# EAGLE board LPC_2TE_3.3 (EAGLE 5.00)
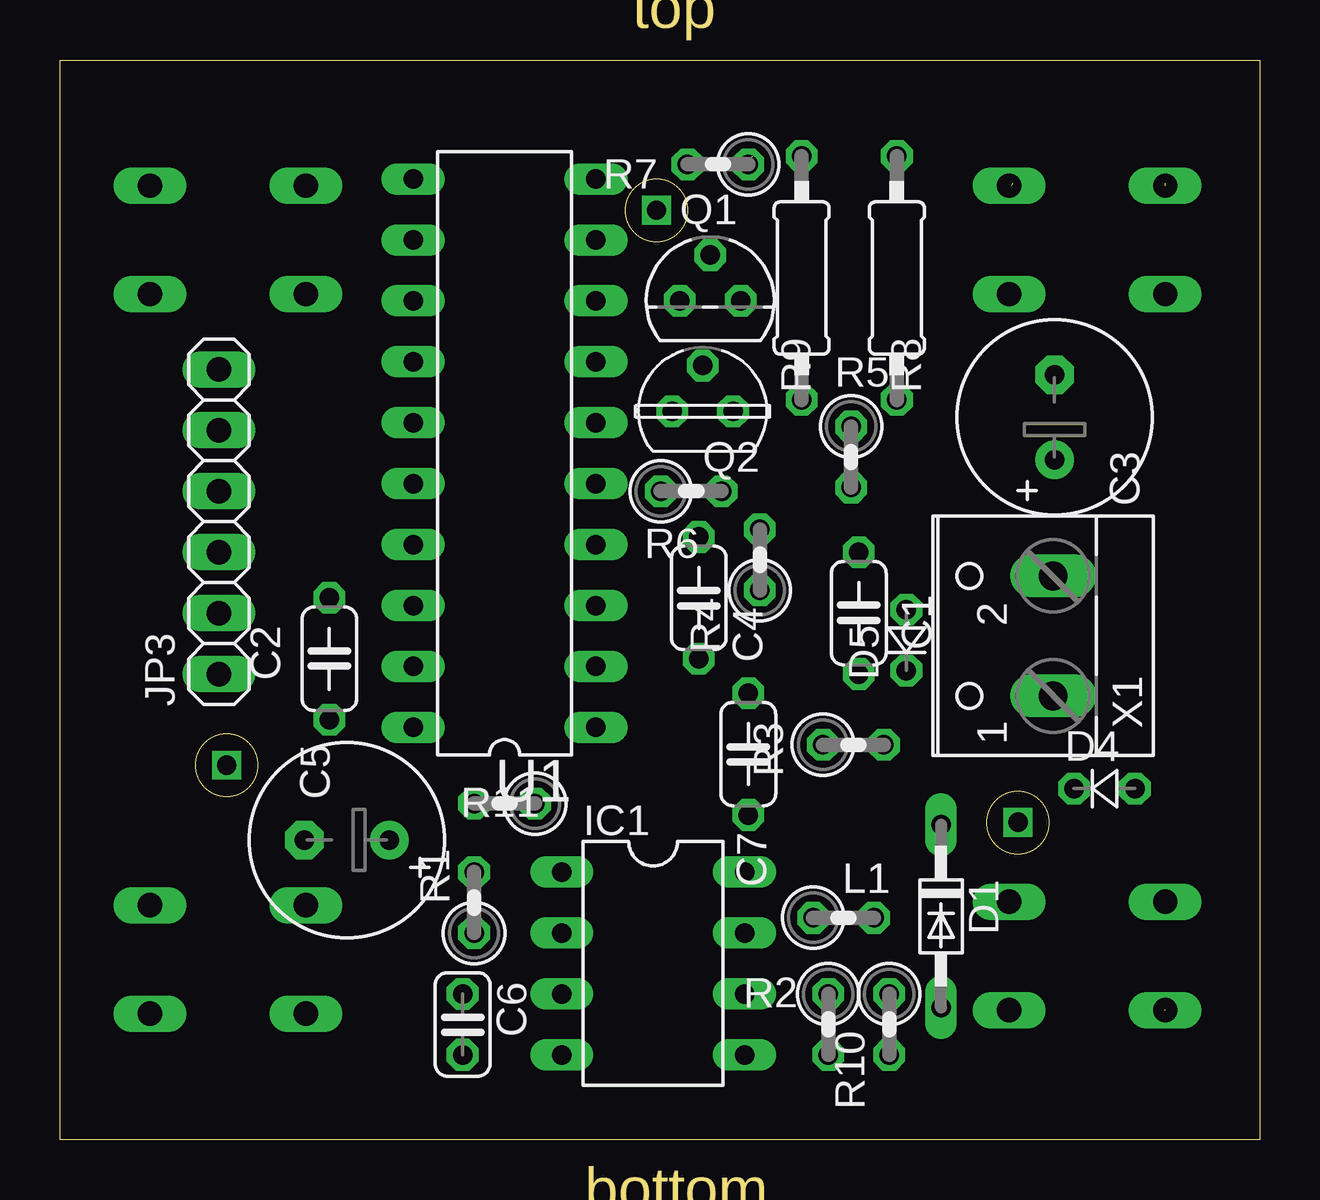
[diagram p0: board, top side]
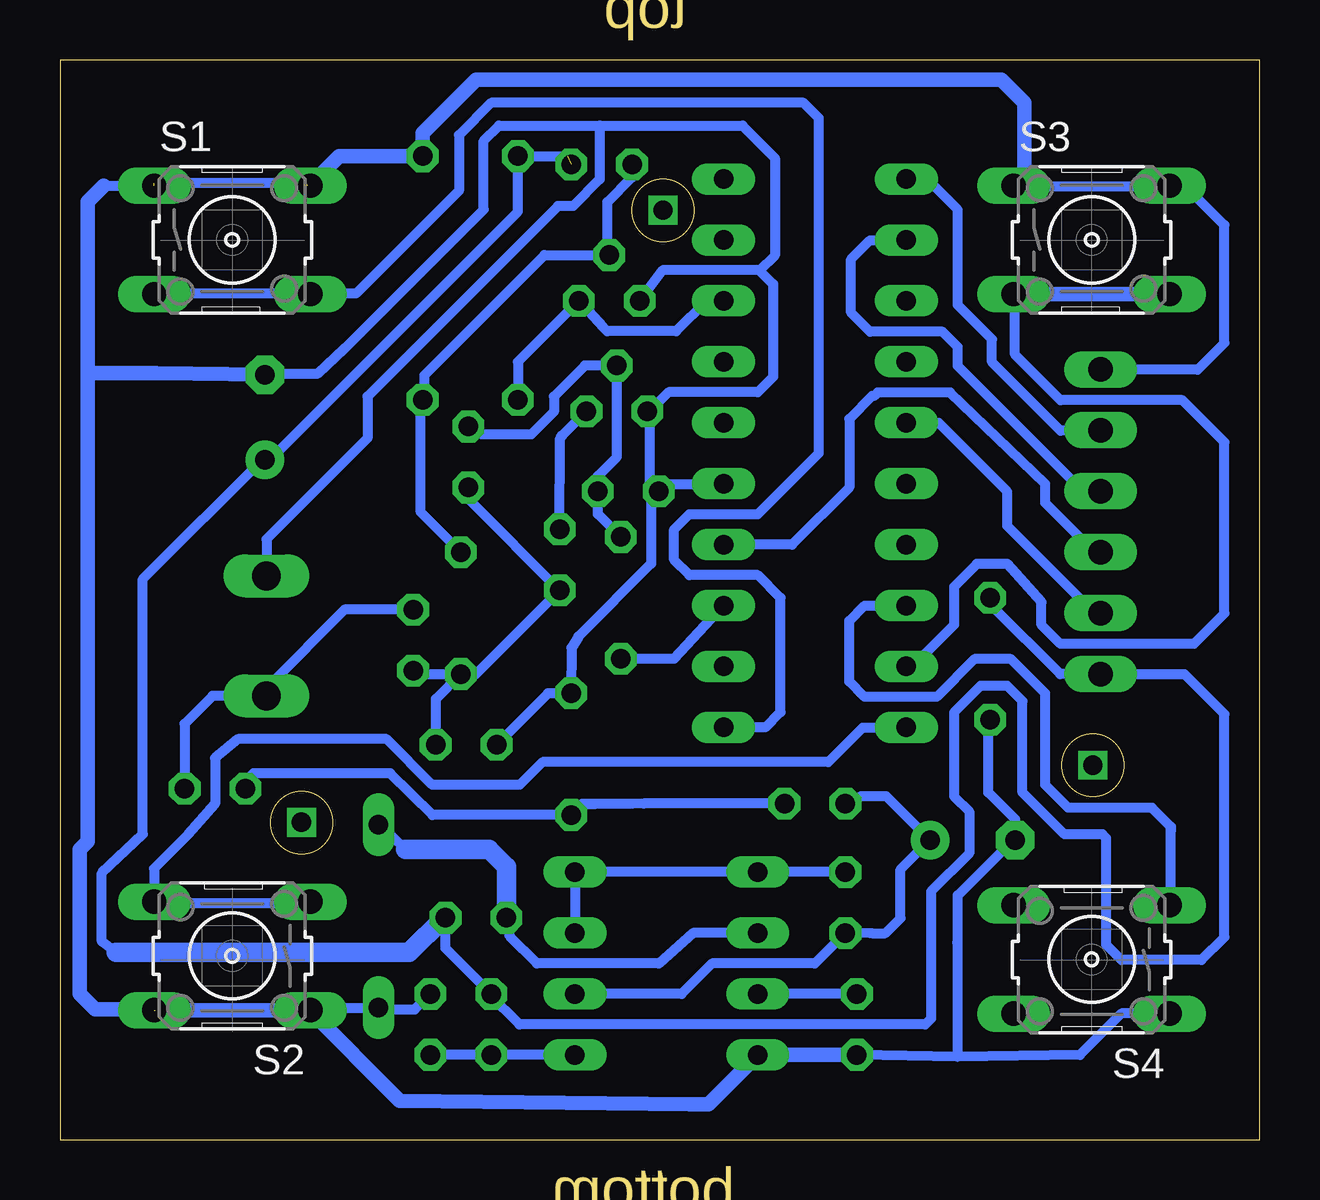
[diagram p1: board, bottom side, seen from below]

Size 50 x 45 mm. Coordinates in mm from the lower left corner, seen from the top.
Outline: 50,0 0,0 0,45 50,45 50,0
Outline: circle at 39.93,13.21 radius 1.3
Outline: circle at 24.87,38.73 radius 1.3
Outline: circle at 6.95,15.6 radius 1.3
Copper layers (1*16): Top 0.035mm / dielectric 1.5mm / Bottom 0.035mm
Design rules "default *": minimum track width 10mil, minimum drill 24mil, track to track 12mil, track to pad 12mil, pad to pad 12mil, via to via 16mil, smd to smd 8mil, copper to edge 20mil, drill to drill 8mil, minimum pad ring 10mil, minimum via ring 8mil, stop-mask expansion 4mil, vias tented up to drill 0mil, thermal gap 10mil
tKeepout: area 16.2,44 to 33.7,45; area 0,0.1 to 4,45; area 0.1,0 to 50,1; area 45.8,0.1 to 50,45; area 39.6,38.3 to 45.9,44.9; area 36.2,41.7 to 39.6,45; area 34.5,43.2 to 36.1,45; area 43,35 to 45.8,38.3; area 44.6,33.4 to 45.8,34.9; area 41.4,36.6 to 42.9,38.2; area 37.9,39.9 to 39.6,41.7; area 40.8,0.8 to 45.9,7.7; area 37.5,0.7 to 40.6,4.6; area 3.5,44.1 to 16.2,45; area 3.8,38.1 to 10.4,44.1; area 4,34.8 to 7.1,38.1; area 10.4,41.2 to 13.4,44.1; area 13.4,42.6 to 14.8,44.1; area 10.3,39.9 to 12.1,41.2; area 7.1,36.5 to 8.7,38; area 4,33.1 to 5.4,34.7; area 33.8,44.1 to 34.5,45; area 4,1 to 9.9,7.1; area 4.1,7 to 6.7,10.2; area 4,10.2 to 5.2,11.6; area 6.7,7 to 8.1,8.7; area 9.9,1 to 12.8,4.3; area 9.8,4.3 to 11.1,5.8; area 12.7,1 to 14.5,2.6; area 43.5,7.4 to 45.8,10.6; area 42.2,7.7 to 43.5,9.4; area 44.8,10.6 to 45.8,11.9; area 39.2,4.5 to 40.8,6.5; area 40.6,0.8 to 41.1,4.7; area 36.1,1.1 to 37.5,3.3; area 35.2,1 to 36.1,2.4; area 28.9,0 to 31.4,1; 10 lines
bKeepout: area 18.3,18 to 19.6,21.2; area 30.5,18 to 31.8,27.9; area 45,17.2 to 50,27.2; area 57.8,34.3 to 62.8,44.3; area 51.1,34.3 to 56.1,44.3; area 0,17.2 to 5,27.2; area 0,0 to 50,2.8; area 0,42.2 to 50,45; area 22.4,38.3 to 27.4,39.2; area 39.4,11 to 40.5,15.4; area 6.5,13.4 to 7.5,17.8; area 47.8,0 to 50,45; area 0,0 to 2.2,45

## Footprints (pad centres in the part's own frame; a part is rotated, then mirrored left to right if it is on the bottom)
C050-024X044 = drill 0.813 octagon: 1 -2.54,0; 2 2.54,0
E3,5-8 = drill 0.813 pad 1.6 round: + -1.778,0 | drill 0.813 pad 1.6 octagon: - 1.778,0
C025-024X044 = drill 0.813 octagon: 1 -1.27,0; 2 1.27,0
DO34-7 = drill 0.813 long: A 3.81,0; C -3.81,0
D-2.5 = drill 0.813 octagon: A 1.27,0; C -1.27,0
DIL08 = drill 0.813 long: 1 -3.81,-3.81; 2 -1.27,-3.81; 3 1.27,-3.81; 4 3.81,-3.81; 5 3.81,3.81; 6 1.27,3.81; 7 -1.27,3.81; 8 -3.81,3.81
1X06 = drill 1.016 long: 1 -6.35,0; 2 -3.81,0; 3 -1.27,0; 4 1.27,0; 5 3.81,0; 6 6.35,0
0207/2V = drill 0.813 octagon: 1 -1.27,0; 2 1.27,0
TO92 = drill 0.813 octagon: 1 1.27,0; 2 0,1.905; 3 -1.27,0
TO237 = drill 0.813 octagon: 1 1.27,0; 2 0,1.905; 3 -1.27,0
0207/2V@1 = drill 0.813 octagon: 1 -1.27,0; 2 1.27,0
0207/10@1 = drill 0.813 octagon: 1 -5.08,0; 2 5.08,0
B3F-10XX = drill 1.016 long: 1 -3.251,2.261; 2 3.251,2.261; 3 -3.251,-2.261; 4 3.251,-2.261
TASTER-9314_SMD = smd 2.1 x 1.4: 1 -5,2.25; 2 5,2.25; 3 -5,-2.25; 4 5,-2.25
DIL20 = drill 0.813 long: 1 -11.43,-3.81; 2 -8.89,-3.81; 3 -6.35,-3.81; 4 -3.81,-3.81; 5 -1.27,-3.81; 6 1.27,-3.81; 7 3.81,-3.81; 8 6.35,-3.81; 9 8.89,-3.81; 10 11.43,-3.81; 11 11.43,3.81; 12 8.89,3.81; 13 6.35,3.81; 14 3.81,3.81; 15 1.27,3.81; 16 -1.27,3.81; 17 -3.81,3.81; 18 -6.35,3.81; 19 -8.89,3.81; 20 -11.43,3.81
W237-102 = drill 1.194 long: 1 -2.5,-1.27; 2 2.5,-1.27

## Placement (x,y rotation side)
C1  100n  [C050-024X044]  33.29,21.94 90 top
C2  100n  [C050-024X044]  11.23,20.04 90 top
C3  100µ  [E3,5-8]  41.46,30.1 90 top
C4  100n  [C050-024X044]  26.63,22.58 270 top
C5  100µ  [E3,5-8]  11.96,12.48 180 top
C6  470p  [C025-024X044]  16.79,4.8 270 top
C7  100n  [C050-024X044]  28.69,16.07 270 top
D1  BAT46  [DO34-7]  36.72,9.31 270 top
D4  [D-2.5]  43.53,14.63 0 top
D5  [D-2.5]  35.28,20.82 90 top
IC1  MC34063AP  [DIL08]  24.72,7.34 270 top
JP3  [1X06]  6.63,25.75 90 top
L1  220µ  [0207/2V]  32.66,9.24 0 top
Q1  BC557  [TO92]  27.1,34.96 0 top
Q2  2N7000  [TO237]  26.79,30.36 0 top
R1  0,33  [0207/2V@1]  17.26,9.88 90 top
R2  3k3  [0207/2V@1]  32.02,4.8 270 top
R3  100k  [0207/2V@1]  33.07,16.45 0 top
R4  68  [0207/2V@1]  29.17,24.17 90 top
R5  390k  [0207/2V@1]  32.98,28.45 270 top
R6  12k  [0207/2V@1]  26.31,27.02 0 top
R7  82k  [0207/2V@1]  27.42,40.65 180 top
R8  47k  [0207/10@1]  34.88,35.91 270 top
R9  10k  [0207/10@1]  30.91,35.91 270 top
R10  2k2  [0207/2V@1]  34.56,4.8 270 top
R11  120  [0207/2V@1]  18.53,14.01 180 top
S1  [B3F-10XX]  42.82,37.5 0 bottom
S2  [B3F-10XX]  42.82,7.65 180 bottom
S3  [B3F-10XX]  7,37.5 0 bottom
S4  [B3F-10XX]  7,7.5 180 bottom
S5  [TASTER-9314_SMD]  87.81,41.66 180 top  (outside the outline)
S6  [TASTER-9314_SMD]  87.78,31.16 0 top  (outside the outline)
S7  [TASTER-9314_SMD]  87.53,21.95 0 top  (outside the outline)
S8  [TASTER-9314_SMD]  87.52,12.72 0 top  (outside the outline)
U1  89LPC922  [DIL20]  18.53,28.61 90 top
X1  [W237-102]  40.12,20.99 90 top

## Library data of the parts
C1-C7 L1 R1-R11 = rcl
D1 D4 D5 = diode
IC1 = mc34063
JP3 = pinhead
Q1 = transistor-pnp
Q2 = transistor-fet
S1-S4 = switch-omron
S5-S8 = Ergaenzung
U1 = micro-philips
X1 = con-wago-500

## Nets
GND: C2.1 C3.- C5.- C6.2 C7.1 D1.A IC1.4 JP3.6 Q1.3 Q2.3 R3.1 R6.1 R8.1 R10.1 S1.1 S1.2 S2.1 S2.2 S3.1 S3.2 S4.1 U1.5 X1.2
N$1: Q1.1 R9.2 U1.8
N$2: C1.2 Q1.2 R7.2 R8.2
N$3: D4.A D5.A X1.1
N$4: C1.1 D5.C R3.2 R4.1 R5.2
N$5: C4.2 U1.3
N$6: Q2.1 R4.2
N$8: IC1.1 IC1.7 IC1.8 R1.2
N$10: C5.+ IC1.6 R1.1 R11.2
N$11: IC1.5 R2.2 R10.2
N$12: D1.C IC1.2 L1.1
N$13: C7.2 D4.C R11.1
N$14: C6.1 IC1.3
N$29: JP3.4 U1.12
N$30: JP3.5 U1.11
N$31: JP3.3 U1.4
N$32: JP3.2 U1.15
N$34: C4.1 Q2.2 R5.1 R6.2
P0.0: S1.3 S1.4 U1.1
P0.1: S2.3 S2.4 U1.20
P0.2: S3.3 S3.4 U1.19
P0.3: S4.3 U1.18
VCC: C2.2 C3.+ JP3.1 L1.2 R2.1 R7.1 R9.1

## Tracks (layer width: path | path; a pad name or v marks a point on that pad's centre or on a via)
GND  (3 unrouted)
  Bottom 0.406: 25.44,30.34 24.63,31.15 20.91,31.15 20.28,31.79 20.28,35.66 20.83,36.22 | 25.44,30.34 Q2.3 | R6.1 25.36,26.71 25.36,24.01 28.39,20.98 28.68,20.5 C7.1 28.77,18.6 29.66,18.6 31.79,16.47 31.79,16.44 | Q1.3 24.88,36.23 20.85,36.23 20.83,36.22 | 27.5,42.26 31.71,42.26 32.34,41.63 32.34,38.77 34.41,36.71 38.14,32.98 39.25,31.93 40.84,31.93 41.47,31.9 C3.- | 27.5,42.26 21.55,42.26 20.2,40.91 20.2,36.85 20.83,36.22 | S4.1 3.76,5.26 5.75,5.26 7.49,3.53 12.6,3.46 | 12.6,3.46 C6.2 | 39.73,39.87 46.08,39.87 | C2.1 11.31,17.58 11.31,14.47 10.2,13.36 10.2,12.5 | 12.58,8.21 12.58,10.18 10.2,12.56 10.2,12.5 | 10.2,12.5 C5.- | 36.71,5.42 36.72,5.43 D1.A | S2.1 39.57,5.42 39.49,5.5 D1.A | 48.85,23.3 48.83,23.3 | 12.6,3.46 12.58,3.46 12.58,8.21 | 12.58,8.21 12.6,8.21 | S1.1 46.13,39.76 46.23,39.87 46.34,39.76 48.18,39.76 | R6.1 25.11,27.02 25.12,27.01 25.44,27.33 25.44,30.34 | U1.5 22.36,27.33 24.74,27.33 R6.1 | 36.71,5.42 36.71,5.49 D1.A | R10.1 35.21,5.42 36.71,5.42 | 9.76,39.76 9.71,39.71 3.8,39.71 S3.2 3.1,39.76 1.47,38.12 1.47,33.2 2.58,32.09 6.55,32.09 6.56,32.1 JP3.6 | 31.79,16.44 31.79,16.37 | 31.79,16.44 R3.1 | X1.2 41.39,25.03 37.19,29.23 37.19,30.98 29.25,38.91 28.61,38.91 27.5,40.03 27.5,42.26
  Bottom 0.61: 48.18,39.76 48.85,39.09 48.85,31.94 | 48.85,31.94 48.85,23.3 48.85,12.42 49.17,12.1 49.17,6.07 48.53,5.43 45.99,5.43 46.03,5.39 S2.1 39.68,5.39 39.65,5.43 | 39.65,39.72 39.68,39.76 S1.2 | 39.65,5.43 39.61,5.39 | 39.65,5.43 35.84,1.62 23.77,1.46 22.98,1.46 IC1.4 C6.2 | 39.65,39.72 39.61,39.76 | 39.65,39.72 38.38,40.99 R8.1 34.88,41.95 32.66,44.17 10.75,44.17 9.8,43.22 9.8,39.72 | 9.8,39.72 9.76,39.76 S3.1 | 9.8,39.72 9.84,39.76 | 48.85,31.94 45.99,31.94 C3.-
N$1
  Bottom 0.406: U1.8 23.06,34.95 24.31,33.69 27.2,33.69 27.34,33.84 Q1.1 30.91,32.42 R9.2
N$2
  Bottom 0.406: Q1.2 29.8,36.87 34.8,31.86 34.8,30.82 34.87,30.82 R8.2 | R8.2 34.96,30.28 | Q1.2 27.18,36.95 | R8.2 34.96,30.75 34.96,26.15 C1.2 | R7.2 26.15,40.11 27.18,39.07 27.18,37.01 27.1,36.93 Q1.2
N$3
  Bottom 0.406: D5.A 38.14,22.09 41.31,18.91 41.31,18.57 X1.1 43.64,18.49 44.8,17.33 D4.A
N$4
  Bottom 0.406: 32.9,27.1 R5.2 32.96,27.17 32.9,27.17 32.9,26.63 R4.1 32.67,19.39 33.31,19.39 | 33.31,19.39 33.38,19.39 | D5.C 35.28,19.39 33.31,19.39 | 33.31,19.39 C1.1 34.33,18.37 34.33,16.47 R3.2
N$5
  Bottom 0.406: C4.2 24.41,20.04 U1.3
N$6
  Bottom 0.406: R4.2 29.15,29.23 29.02,29.39 Q2.1
N$7  (via drill 0.8)
  other vias: 24.86,38.73
N$8
  Bottom 0.406: IC1.7 IC1.8 IC1.1 R1.2
N$9  (via drill 0.8)
  other vias: 6.95,15.6
N$10
  Bottom 0.406: IC1.6 24.09,6.07 22.82,7.34 18.53,7.34 R1.1 16.16,8.59 | R11.2 16.61,14.31 15.56,14.31 C5.+ 14.96,11.26 14.96,9.23 15.6,8.59 16.16,8.59 | 16.16,8.59 16.23,8.59
N$11
  Bottom 0.406: IC1.5 R2.2 R10.2
N$12
  Bottom 0.406: IC1.2 23.61,8.61 25.04,7.34 30.12,7.34 31.23,8.45 L1.1 | 35.6,12.09 36.72,13.18 D1.C
  Bottom 0.813: L1.1 31.39,11.37 32.11,12.09 35.6,12.09
N$13
  Bottom 0.406: R11.1 25.68,14.01 26.14,13.99 28.23,13.99 | D4.C 42.11,15.1 41.95,15.26 36.23,15.26 34.47,13.53 C7.2 28.23,13.99 | 28.23,13.99 27.66,13.99
N$14
  Bottom 0.406: C6.1 IC1.3
N$15  (via drill 0.8)
  other vias: 39.94,13.22
N$29
  Bottom 0.406: U1.12 16.23,37.49 17.02,36.69 17.02,34.47 16.23,33.68 13.21,33.68 12.58,33.04 12.58,32.25 7.34,27.01 6.64,27.01 JP3.4
N$30
  Bottom 0.406: JP3.5 6.64,29.55 8.29,29.55 11.15,32.41 11.15,33.36 12.58,34.79 12.58,38.76 13.85,40.03 14.71,40.03 U1.11
N$31
  Bottom 0.406: U1.4 19.48,24.8 17.1,27.18 17.1,30.04 16.15,30.99 16.06,30.99 15.91,31.14 12.9,31.14 8.93,27.33 8.93,26.53 6.88,24.48 JP3.3
N$32
  Bottom 0.406: JP3.2 6.88,21.94 10.52,25.58 10.52,27.01 13.37,29.87 14.64,29.87 14.66,29.88 U1.15
N$34
  Bottom 0.406: C4.1 27.58,26.07 R6.2 27.58,27.66 26.79,28.45 Q2.2 28.12,32.26 29.41,30.98 29.41,30.34 30.36,29.39 32.42,29.39 33.06,30.03 33.04,30.04 R5.1
P0.0
  Bottom 0.406: U1.1 20.59,17.18 19.96,17.82 19.96,22.58 20.91,23.53 23.77,23.53 24.41,24.17 24.41,25.44 23.77,26.07 20.91,26.07 18.37,28.61 18.37,42.58 19.01,43.22 32.02,43.22 33.38,41.87 33.38,39.55 37.66,35.26 39.57,35.26 S1.4 39.59,35.26 46.08,35.26 S1.3
P0.1
  Bottom 0.406: U1.20 14.73,17.17 16.55,17.17 17.98,15.74 29.88,15.74 30.84,14.79 34.49,14.79 36.39,16.69 42.58,16.69 43.53,15.9 43.53,13.99 44.65,12.72 | S2.4 46.02,9.86 45.92,9.86 45.92,10.34 | S2.4 46.08,9.86 39.62,9.86 S2.3 | 44.65,12.72 | 44.65,12.72 46.08,11.29 46.08,10.02 46.07,10.02 S2.4
  Bottom 0.61: S2.3 39.68,9.92
P0.2
  Bottom 0.406: 5.36,35.24 5.04,35.28 | 8.29,35.24 8.29,35.26 | U1.19 14.47,19.72 12.74,21.45 12.74,23.04 11.79,23.99 10.52,23.99 9.09,22.41 9.09,21.45 8.29,20.66 2.74,20.66 1.47,21.93 1.47,29.07 3.21,30.82 8.29,30.82 10.2,32.72 10.2,35.26 10.22,35.26 S3.3
  Bottom 0.61: S3.3 8.29,35.24 3.41,35.24 3.45,35.28 3.49,35.24 5.36,35.24 S3.4
P0.3
  Bottom 0.406: U1.18 16.47,22.26 17.1,21.62 17.1,19.09 16.47,18.45 13.45,18.45 11.88,20.02 10.36,20.02 8.93,18.6 8.93,14.79 7.97,13.83 4.48,13.83 3.69,13.04 3.7,13.04 | S4.3 3.7,9.81 3.7,13.04 | 3.7,13.04 3.7,12.83
VCC  (1 unrouted)
  Bottom 0.406: 28.85,40.99 R9.1 30.91,38.68 41.31,28.28 41.36,28.33 C3.+ 41.46,28.42 41.47,28.44 46.55,23.36 46.55,12.72 48.26,11.11 48.26,8.26 47.66,7.8 | C2.2 11.23,22.64 11.15,22.56 11.15,22.25 8.31,19.4 JP3.1 6.48,19.39 | 6.48,19.39 6.23,19.39 | 6.48,19.39 3.12,19.39 1.47,17.74 1.47,8.44 2.42,7.48 5.75,7.48 6.39,8.12 6.39,12.56 6.55,12.72 8.13,12.72 9.88,14.47 9.88,18.28 10.52,18.91 11.63,18.91 12.74,17.8 12.74,14.31 12.1,13.67 12.1,11.93 13.69,10.34 13.69,5.04 13.93,4.8 30.85,4.8 32.11,6.05 32.09,6.07 R2.1 33.93,7.97 L1.2 34,9.24
  Bottom 0.813: 47.66,7.8 35.44,7.8 34,9.24

## Text on the board
Dimension: top | bottom
tDocu: tiefe hinten 2.84 | tiefe vorne 2.8 | Platine 1.00mm